# Altium PCB PCB_proj_module_1_1.PcbDoc (part 4 of 9)
Units mm, origin at the board's own origin, x right, y up, seen from the top; angles counter-clockwise.
Board outline 413 x 280 mm, 4 copper layers (Top Layer, Signal Layer 1, Signal Layer 2, Bottom Layer), stack 0.778 mm thick; 1054 components, 639 nets, 3181 pads, 673 vias.
Unrouted connection lines stored in the file: 570.
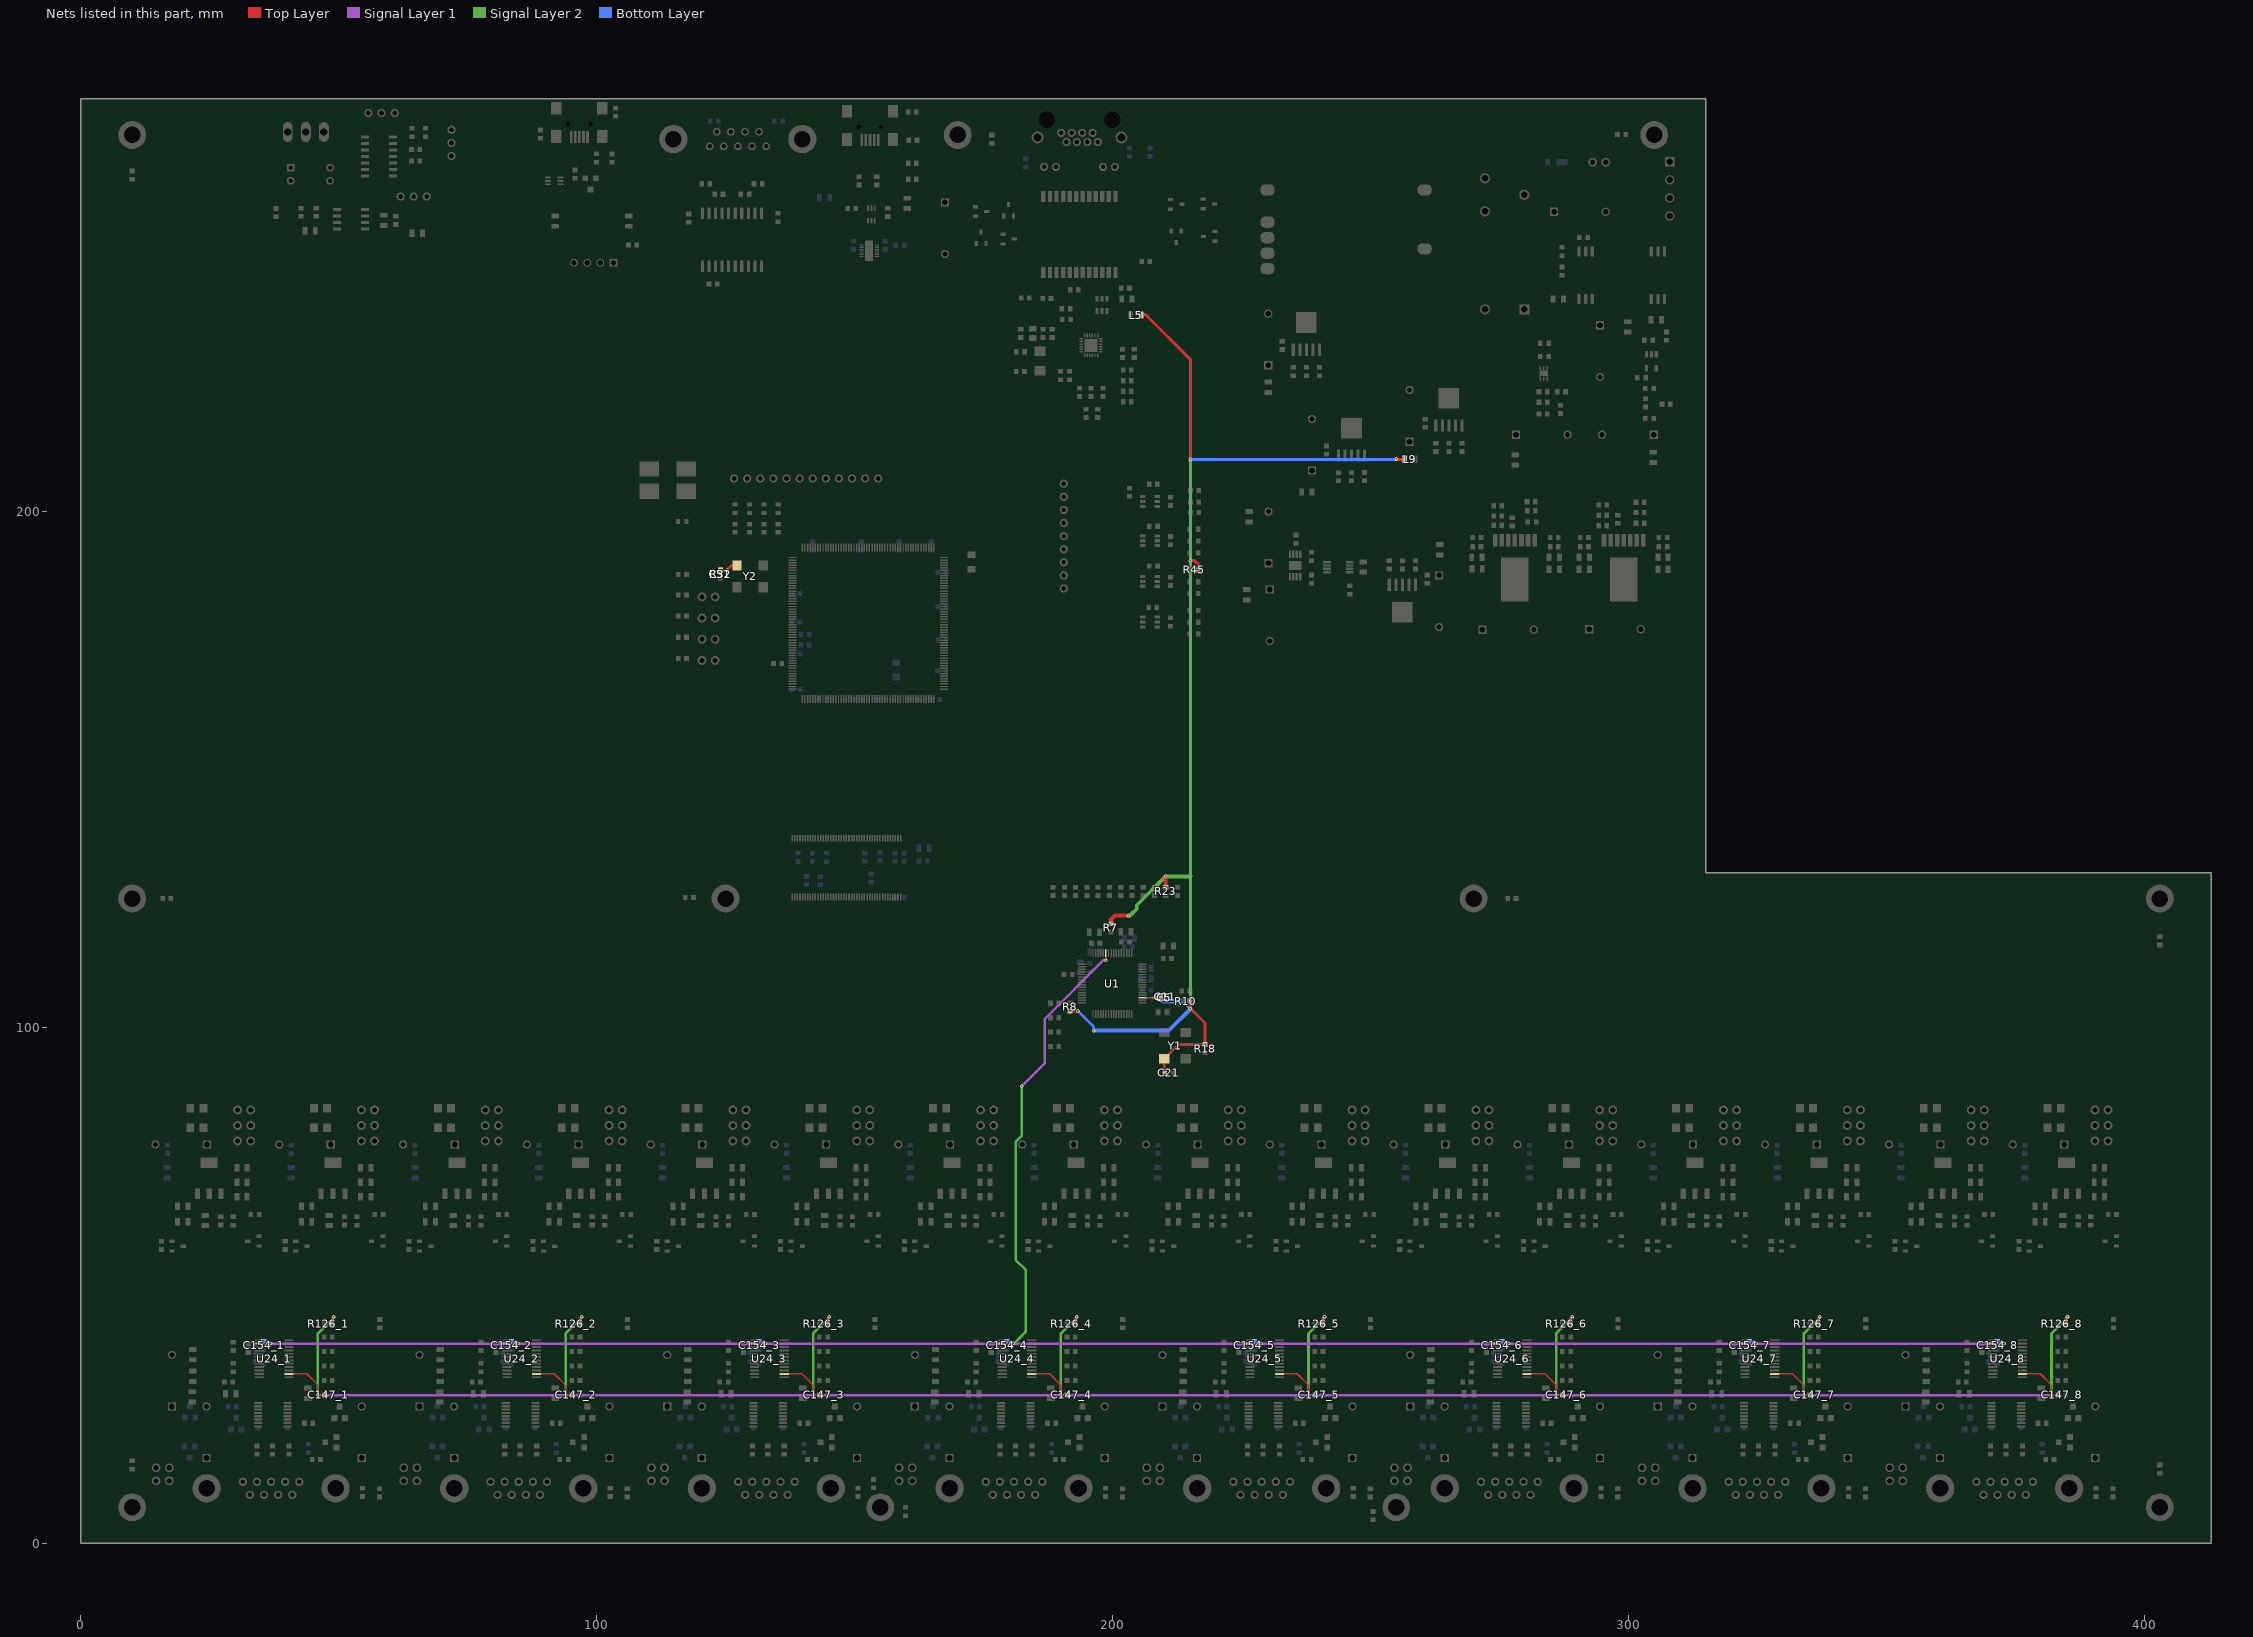
[diagram p5: the nets of this part, all layers, seen from the top]

## Via types
v1: diameter 0.7, hole 0.3, Top Layer to Bottom Layer, tented both sides, 659 vias
v2: diameter 1, hole 0.5, Top Layer to Bottom Layer, tented both sides, 12 vias
v3: diameter 0.66, hole 0.33, Top Layer to Bottom Layer, 2 vias

## Nets (pads, with @x,y where several pads share a name; then routed paths per layer and width w, separated by ;. In a path a pad name is that pad's centre, name@x,y a point inside that pad or via, vN(x,y) a via of type N, cw(c..) or ccw(c..) an arc to the next point about the centre after c; other vN are vias at no path point) (continued)
"3V3 Digital AD7768, PGA": (continued)
  Top Layer w0.6: L5.2@205.5,238.2 206.4,238.2 215.1,229.5 v1(215.1,210.1) ; v1(215.1,190.5) 215.9,190.5 216.612,189.788 R45.2@216.612,188.696 ; v1(255,210.2) 255.1,210.1 L9.2@256.6,210.1
  Top Layer w0.75: R7.2@199.7,120.1 199.7,120.9 200.5,121.7 v1(203.1,121.7) ; v1(210.3,129.3) 210.318,129.282 R23.2@210.318,127.2
  Signal Layer 1 w0.5: v1(46,28.7) v1(94,28.7) v1(142,28.7) v1(190,28.7) v1(238,28.7) v1(286,28.7) v1(334,28.7) v1(382,28.7)
  Signal Layer 2 w0.5: v1(46,28.7) 46,40.7 49.1,43.8 v1(49.1,43.9) ; v1(94,28.7) 94,40.7 97.1,43.8 v1(97.1,43.9) ; v1(142,28.7) 142,40.7 145.1,43.8 v1(145.1,43.9) ; v1(190,28.7) 190,40.7 193.1,43.8 v1(193.1,43.9) ; v1(238,28.7) 238,40.7 241.1,43.8 v1(241.1,43.9) ; v1(286,28.7) 286,40.7 289.1,43.8 v1(289.1,43.9) ; v1(334,28.7) 334,40.7 337.1,43.8 v1(337.1,43.9) ; v1(382,28.7) 382,40.7 385.1,43.8 v1(385.1,43.9)
  Signal Layer 2 w0.6: v1(215.1,103.6) 215.1,129.4 v1(215.1,190.5) v1(215.1,210.1)
  Signal Layer 2 w0.75: v1(203.1,121.7) 203.408,121.7 204.7,122.992 204.7,123.7 v1(210.3,129.3) 215,129.3 215.1,129.4
  Bottom Layer w0.254: v1(208.125,105.774) C11.2@209.3,105.774 ; C11.2@209.3,106.298 209.3,105.225 209.75,104.775 213.85,104.775 215.025,103.6 v1(215.1,103.6)
  Bottom Layer w0.5: v1(193.3,103.2) 196.4,100.1 v1(196.4,99.4)
  Bottom Layer w0.508: C51.1@124.025,188.675 124.05,188.65 v1(125.275,188.65)
  Bottom Layer w0.6: v1(215.1,210.1) v1@255,210.1
  Bottom Layer w0.75: v1(196.4,99.4) 210.9,99.4 v1(215.1,103.6)